# Altium PCB Tube03.PcbDoc (part 1 of 2)
Units mil, origin at the board's own origin, x right, y up, seen from the top; angles counter-clockwise.
Board outline 3701.35 x 3701.35 mil, 2 copper layers (Top Layer, Bottom Layer); 116 components, 79 nets, 440 pads, 68 vias.
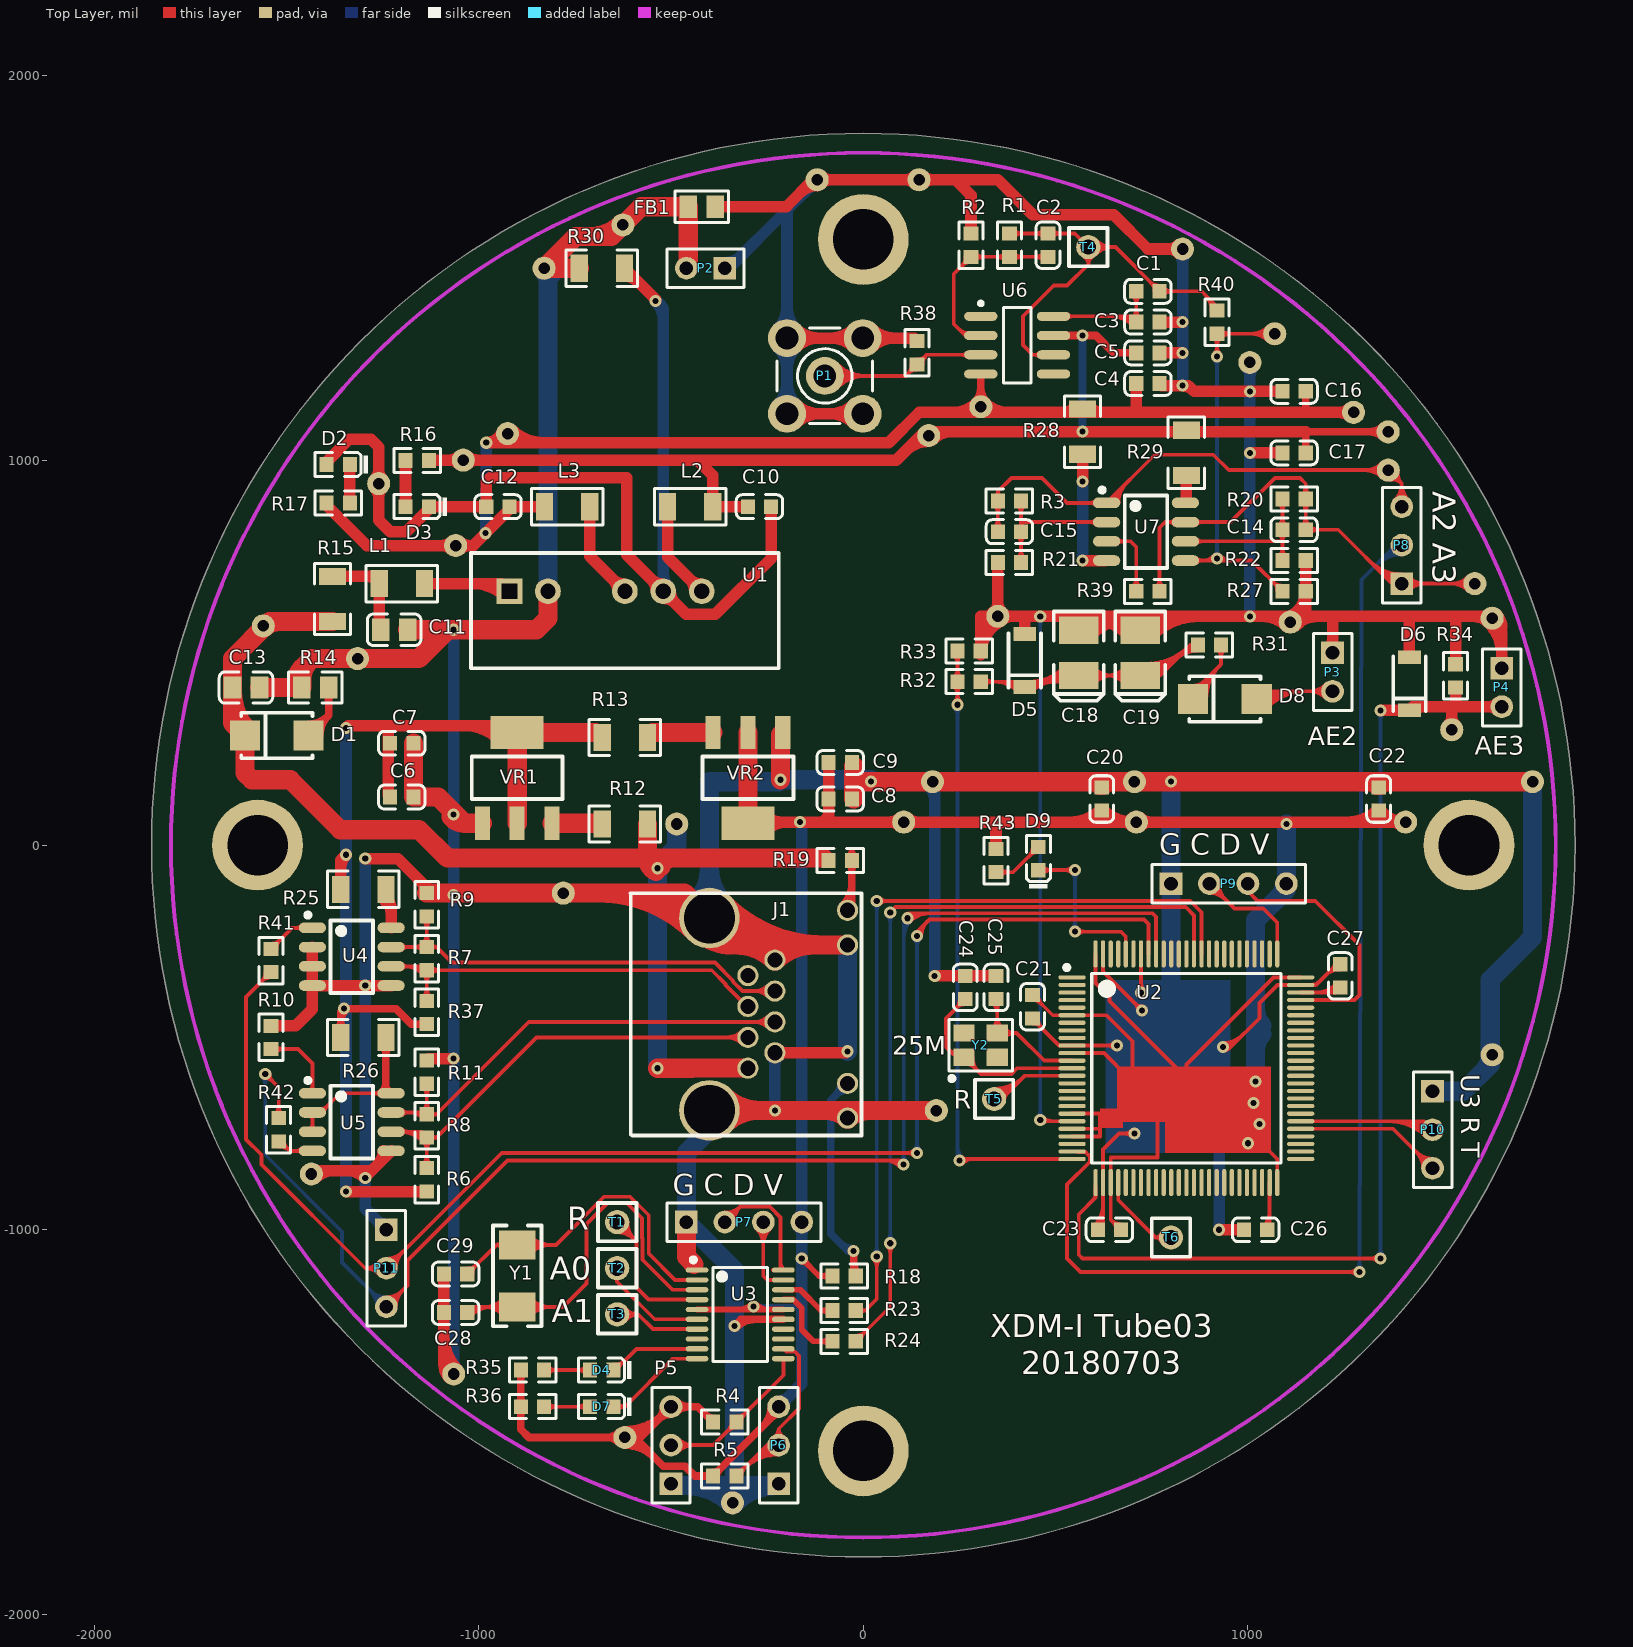
[diagram p0: Top Layer view]
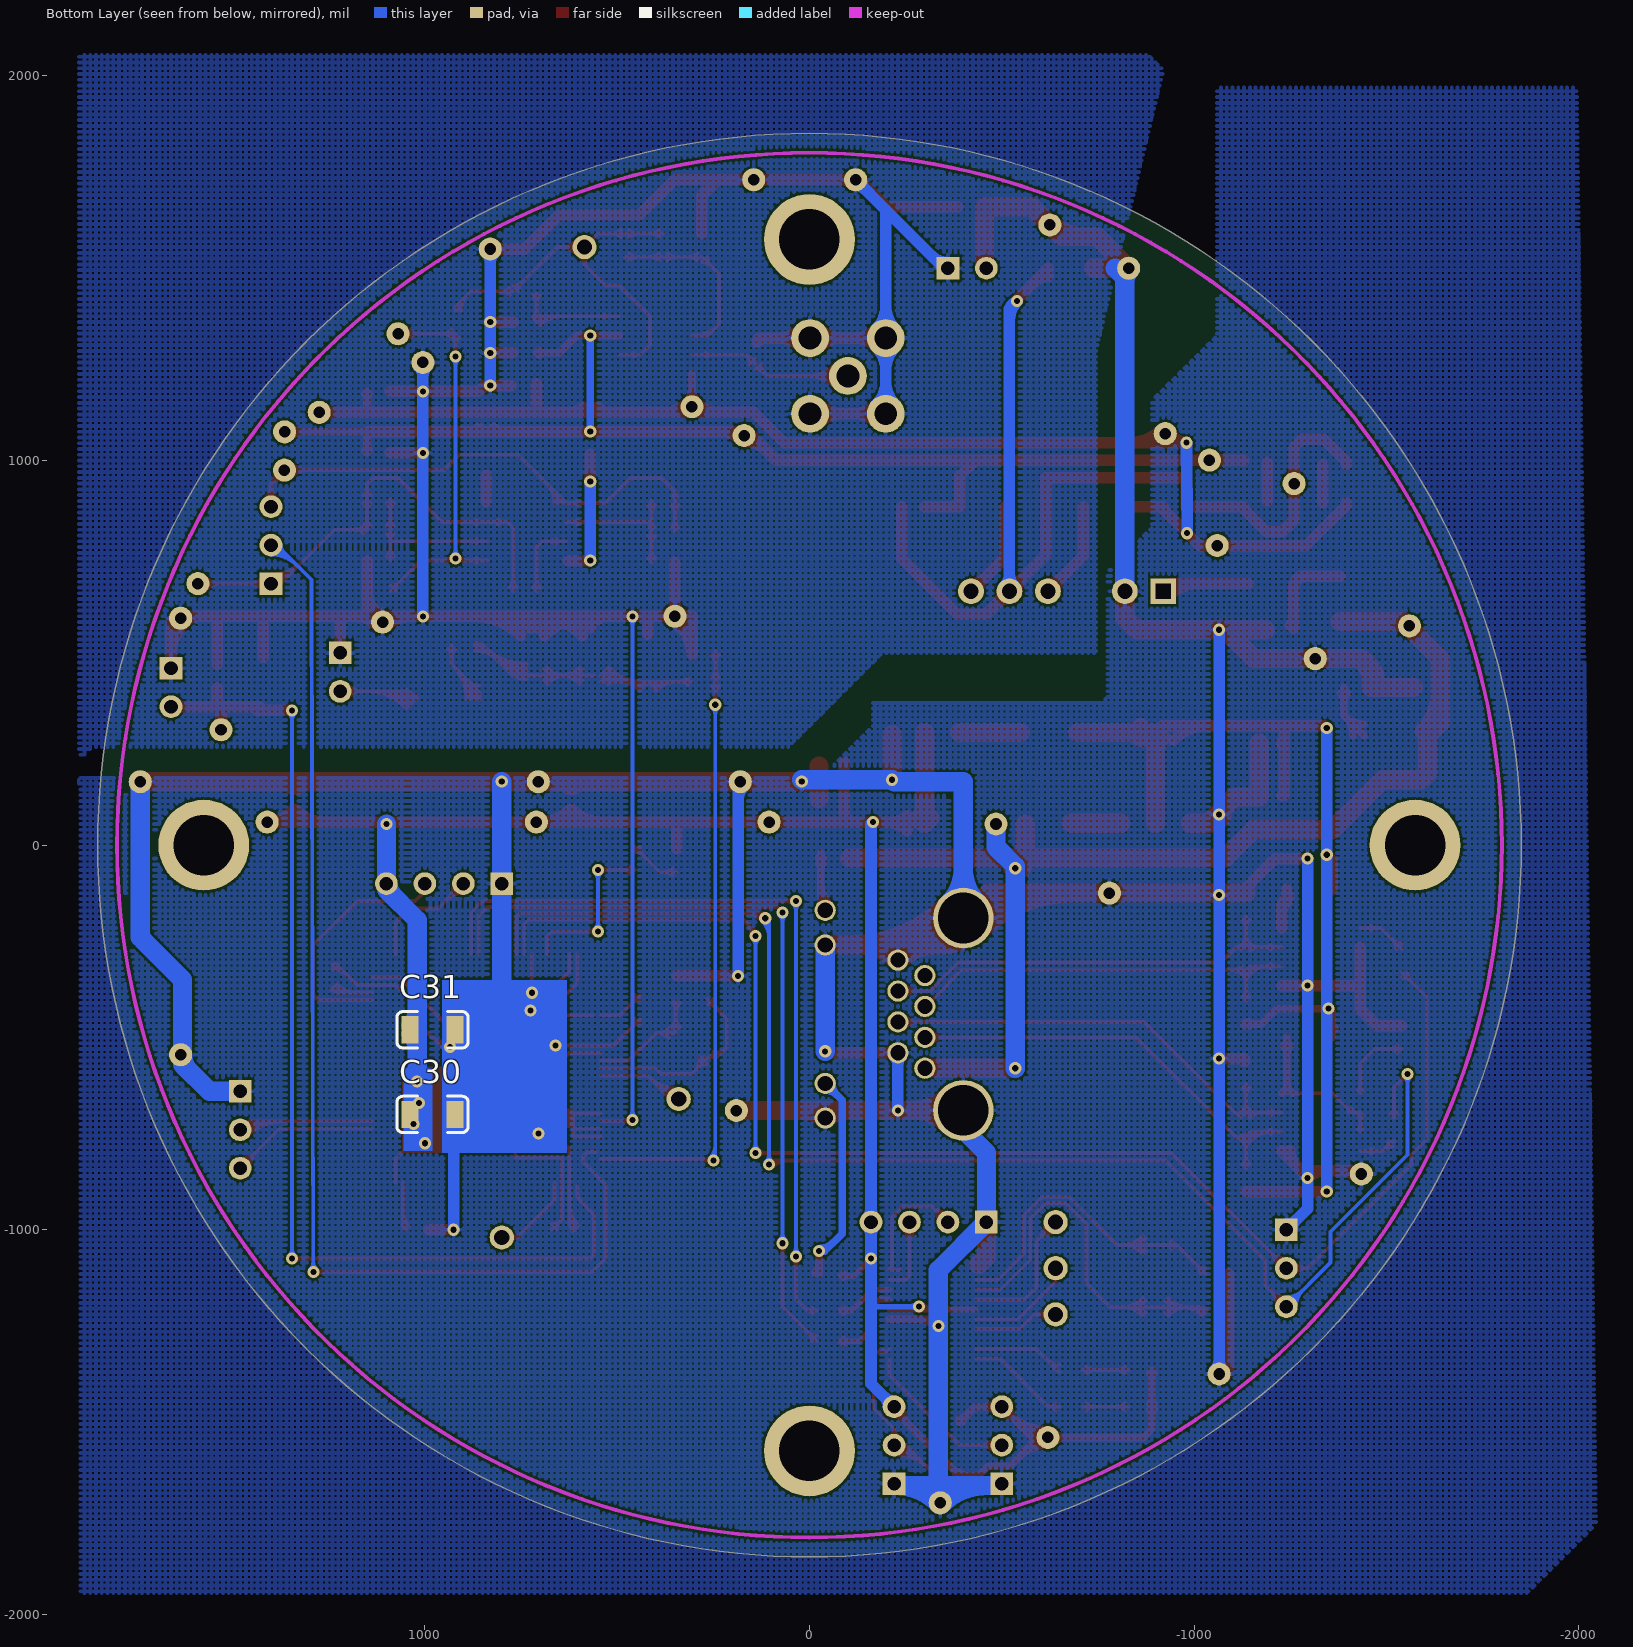
[diagram p1: Bottom Layer view, seen from below]
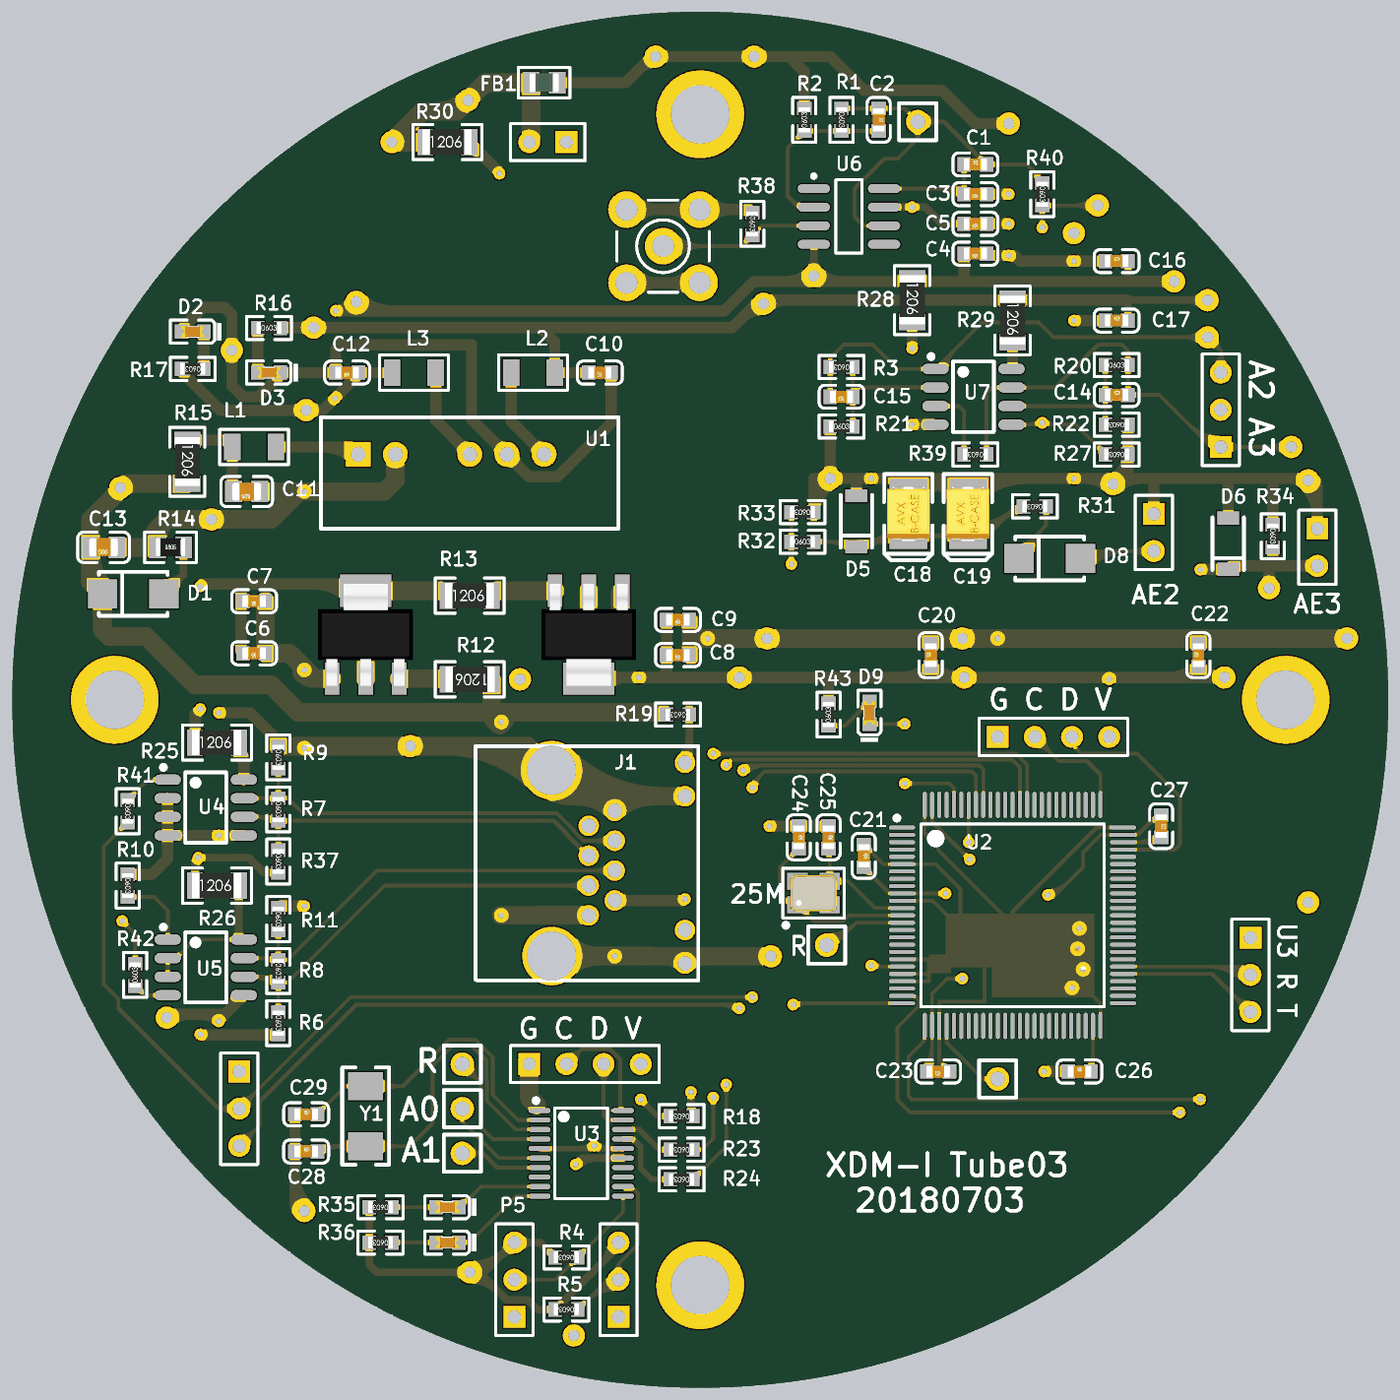
[diagram p3: 3D render of the assembled board from above, using the file's embedded part models]

## Layer stack, top to bottom
Top Layer: signal copper 1.4
Dielectric: dielectric 12.6, FR-4, Dk 4.8
Bottom Layer: signal copper 1.4

## Board outline
-1850.68,0 ccw(c0,0) 0,-1850.68 ccw(c0,0) 1850.68,0 ccw(c0,0) 0,1850.68 ccw(c0,0)

## Design rules (kind name [scope] priority, off if disabled: settings)
Clearance [All] p1: gap=6
DiffPairsRouting [All] p1: maxlimit=10 minlimit=10 mostfreqgap=10 maxuncoupledlength=500
Height [All] p1 off: minheight=0 maxheight=1000 prefheight=500
HoleSize [All] p1: absolutevalues=TRUE maxlimit=196.85 minlimit=11.81 maxpercent=80.000 minpercent=20.000
MinimumSolderMaskSliver [All] p1: minsoldermaskwidth=4
PolygonConnect [All] p1: connectstyle=Relief reliefconductorwidth=10 reliefentries=4 polygonreliefangle="90 Angle"
RoutingVias [All] p1: holewidth=15.75 width=31.5 viastyle="Through Hole" minholewidth=15.75 minwidth=31.5 maxholewidth=15.75 maxwidth=31.5
SilkscreenOverComponentPads [All] p1: minsilkscreentomaskgap=6
SolderMaskExpansion [All] p1: expansion=4
Width Width_V12 [InNet('V12')] p1: maxlimit=50 minlimit=10 preferedwidth=20
Width Width_V3.3 [InNet('V3.3')] p2: maxlimit=50 minlimit=10 preferedwidth=25
Width Width_V5 [InNet('V5')] p3: maxlimit=50 minlimit=10 preferedwidth=20
Width Width_GND [InNet('GND')] p4: maxlimit=50 minlimit=10 preferedwidth=25
Width [All] p5: maxlimit=50 minlimit=8 preferedwidth=10
23 further rules are at their usual default settings.

## Classes and differential pairs
component class mcu1: D9 P9 P10 R23 R24 R43 T6 U2
component class mcu2: C20 C21 C22 C23 C24 C25 C26 C27 C28 C29 C30 C31 D4 D7 P5 P6 P7 R4 R5 R35 R36 T1 T2 T3 T5 U3 Y1 Y2
component class Aex: C18 C19 D4 D5 D6 P3 P4 R31 R32 R33 R34
component class Power: C6 C7 C8 C9 C10 C11 C12 C13 D1 D2 D3 FB1 L1 L2 L3 P2 R12 R13 R14 R15 R16 R17 R30 U1 VR1 VR2
component class commu: J1 P11 R6 R7 R8 R9 R10 R11 R18 R19 R25 R26 R37 R41 R42 U4 U5
component class Amp: C1 C2 C3 C4 C5 C14 C15 C16 C17 P1 P8 R1 R2 R3 R20 R21 R22 R27 R28 R29 R38 R39 R40 T4 U6 U7
differential pair CON2: +CON2_P -CON2_N
differential pair CON1: +CON1_P -CON1_N

## Components (designator, comment, footprint, x,y, rotation, side; value= is the part's Value field where it differs from the comment)
C1 "47pF (470) 5% 50V" 0603_C 740,1440 r0 top
C2 "10pF (100) 5% 50V" 0603_C 480,1560 r270 top
C3 "10pF (100) 5% 50V" 0603_C 740,1360 r180 top
C4 "100nF (104) 10% 50V" 0603_C 740,1200 r180 top
C5 "100nF (104) 10% 50V" 0603_C 740,1280 r180 top
C6 "10uF (106) 10% 10V" 0603_C -1200,125 r180 top
C7 "100nF (104) 10% 50V" 0603_C -1200,265 r180 top
C8 "10uF (106) 10% 10V" 0603_C -60,120 r180 top
C9 "100nF (104) 10% 50V" 0603_C -60,215 r180 top
C10 "4.7uF (475) 10% 16V" 0603_C -270,880 r180 top
C11 "2.2uF (225) 20% 50V" 0805_C -1220,560 r180 top
C12 "4.7uF (475) 10% 16V" 0603_C -950,880 r180 top
C13 "22uF (226) 20% 25V" 0805_C -1605,410 r180 top
C14 "100nF (104) 10% 50V" 0603_C 1120,820 r0 top
C15 "100nF (104) 10% 50V" 0603_C 380,815 r180 top
C16 "100nF (104) 10% 50V" 0603_C 1120,1180 r0 top
C17 "100nF (104) 10% 50V" 0603_C 1120,1020 r0 top
C18 "100uF (107) ±10% 6.3V" CASE-B_3528 560,500 r270 top
C19 "100uF (107) ±10% 6.3V" CASE-B_3528 720,500 r270 top
C20 "100nF (104) 10% 50V" 0603_C 620,120 r90 top
C21 "100nF (104) 10% 50V" 0603_C 440,-420 r270 top
C22 "100nF (104) 10% 50V" 0603_C 1340,120 r90 top
C23 "100nF (104) 10% 50V" 0603_C 640,-1000 r180 top
C24 "12pF (120) 5% 50V" 0603_C 265,-370 r270 top
C25 "12pF (120) 5% 50V" 0603_C 345,-370 r270 top
C26 "100nF (104) 10% 50V" 0603_C 1020,-1000 r0 top
C27 "100nF (104) 10% 50V" 0603_C 1240,-340 r270 top
C28 "20pF (200) 5% 50V" 0603_C -1060,-1215 r0 top
C29 "20pF (200) 5% 50V" 0603_C -1060,-1115 r0 top
C30 "100nF (104) 10% 50V" 1206_C 980,-700 r180 bottom
C31 "10uF (106) 10% 50V" 1206_C 980,-480 r180 bottom
D1 "SS54" SMA(DO-214AC)_S1 -1525,285 r0 top
D2 "绿灯 0603" 0603_LED_S1 -1365,990 r180 top
D3 "绿灯 0603" 0603_LED_S1 -1160,880 r180 top
D4 "红灯 0603" 0603_LED_S1 -680,-1365 r180 top
D5 "ZMM5V6" LL-34 420,480 r90 top
D6 "ZMM3V3" LL-34 1420,420 r90 top
D7 "蓝灯 0603" 0603_LED_S1 -680,-1460 r180 top
D8 "US1M" SMA(DO-214AC)_S1 940,380 r0 top
D9 "蓝灯 0603" 0603_LED_S1 455,-35 r90 top
FB1 "100Ω ±25% 100MHz" 0805_L -420,1660 r0 top
J1 "RJ45" RJ45_1 -300,-580 r270 top
L1 "4.7uH  ±10%" 1206_L -1200,680 r0 top
L2 "4.7uH  ±10%" 1206_L -450,880 r0 top
L3 "4.7uH  ±10%" 1206_L -770,880 r180 top
P1 "SMB" SMB_V-RJ45 -100,1220 r0 top
P2 "Header 2" HDR1X2 -360,1500 r180 top
P3 "Header 2" HDR1X2 1220,500 r270 top
P4 "Header 2" HDR1X2 1660,460 r270 top
P5 "Header 3" HDR1X3 -500,-1660 r90 top
P6 "Header 3" HDR1X3 -220,-1660 r90 top
P7 "Header 4" HDR1X4 -460,-980 r0 top
P8 "Header 3" HDR1X3 1400,680 r90 top
P9 "Header 4" HDR1X4 800,-100 r0 top
P10 "Header 3" HDR1X3 1480,-640 r270 top
P11 "Header 3" HDR1X3 -1240,-1000 r270 top
R1 "1KΩ (1001) ±1%" 0603_R 380,1560 r270 top
R2 "10Ω (10R0) ±1%" 0603_R 280,1560 r90 top
R3 "1KΩ (1001) ±1%" 0603_R 380,895 r180 top
R4 "10KΩ (1002) ±1%" 0603_R -360,-1500 r180 top
R5 "10KΩ (1002) ±1%" 0603_R -360,-1640 r180 top
R6 "10KΩ (1002) ±1%" 0603_R -1135,-870 r270 top
R7 "120Ω (1200) ±1%" 0603_R -1135,-295 r270 top
R8 "120Ω (1200) ±1%" 0603_R -1135,-730 r270 top
R9 "10KΩ (1002) ±1%" 0603_R -1135,-155 r270 top
R10 "10KΩ (1002) ±1%" 0603_R -1540,-500 r270 top
R11 "10KΩ (1002) ±1%" 0603_R -1135,-590 r270 top
R12 "0.1Ω (R100) ±1%" 1206_R -620,55 r180 top
R13 "0.1Ω (R100) ±1%" 1206_R -620,280 r0 top
R14 "10KΩ (1002) ±1%" 0805_R -1425,410 r0 top
R15 "0.1Ω (R100) ±1%" 1206_R -1380,640 r270 top
R16 "10KΩ (1002) ±1%" 0603_R -1160,1000 r0 top
R17 "10KΩ (1002) ±1%" 0603_R -1365,890 r180 top
R18 "10KΩ (1002) ±1%" 0603_R -50,-1120 r180 top
R19 "47KΩ (4702) ±1%" 0603_R -60,-40 r180 top
R20 "2KΩ (2001) ±1%" 0603_R 1120,900 r0 top
R21 "200Ω (2000) ±1%" 0603_R 380,735 r0 top
R22 "100Ω (1000) ±1%" 0603_R 1120,740 r180 top
R23 "0Ω (0R0) ±1%" 0603_R -50,-1210 r180 top
R24 "0Ω (0R0) ±1%" 0603_R -50,-1290 r180 top
R25 "0Ω (0R0) ±1%" 1206_R -1300,-115 r0 top
R26 "0Ω (0R0) ±1%" 1206_R -1300,-500 r0 top
R27 "10KΩ (1002) ±1%" 0603_R 1120,660 r180 top
R28 "0.1Ω (R100) ±1%" 1206_R 570,1075 r270 top
R29 "0.1Ω (R100) ±1%" 1206_R 840,1020 r270 top
R30 "0Ω (0R0) ±1%" 1206_R -680,1500 r0 top
R31 "1Ω (1R00) ±1%" 0603_R 900,520 r180 top
R32 "10KΩ (1002) ±1%" 0603_R 275,425 r0 top
R33 "20KΩ (2002) ±1%" 0603_R 275,505 r180 top
R34 "75KΩ (7502) ±1%" 0603_R 1540,440 r270 top
R35 "10KΩ (1002) ±1%" 0603_R -860,-1365 r180 top
R36 "10KΩ (1002) ±1%" 0603_R -860,-1460 r180 top
R37 "10KΩ (1002) ±1%" 0603_R -1135,-435 r270 top
R38 "1KΩ (1001) ±1%" 0603_R 140,1280 r270 top
R39 "0Ω (0R0) ±1%" 0603_R 740,660 r180 top
R40 "0Ω (0R0) ±1%" 0603_R 920,1360 r270 top
R41 "0Ω (0R0) ±1%" 0603_R -1540,-300 r270 top
R42 "0Ω (0R0) ±1%" 0603_R -1520,-740 r90 top
R43 "10KΩ (1002) ±1%" 0603_R 345,-40 r90 top
T1 "TP1" TP1 -640,-980 r0 top
T2 "TP1" TP1 -640,-1100 r0 top
T3 "TP1" TP1 -640,-1220 r0 top
T4 "TP1" TP1 585,1555 r0 top
T5 "TP1" TP1 340,-660 r0 top
T6 "TP1" TP1 800,-1020 r0 top
U1 "A1205S" A1205S -1020,760 r0 top
U2 "STM32F407VET6" LQFP-100_14x14x05P 840,-580 r270 top
U3 "STM32F030F4P6" TSSOP-20 -320,-1220 r270 top
U4 "SN75176BDR" SOIC-8_150mil -1330,-290 r270 top
U5 "SN75176BDR" SOIC-8_150mil -1330,-720 r270 top
U6 "AD797AR" SO-8C_N 400,1300 r0 top
U7 "NE5532DR" SOIC-8_150mil 735,815 r270 top
VR1 "AMS1117-5.0" SOT-223 -900,175 r270 top
VR2 "AMS1117-3.3" SOT-223 -300,175 r90 top
Y1 "8MHz ±20ppm 20pF" SMD-5032_2P -900,-1120 r270 top
Y2 "25MHZ 12PF 10PPM" SMD-3225_4P 305,-520 r0 top

## Footprints (in the part's own frame and the unit in brackets; to place one, negate y for a bottom-side part, rotate by r counter-clockwise, add the part's x,y. Pads: shape width x height; smd on the part's side, far side on the other; paste and mask are expansions set on the pad)
0603_C [mm]
  rect 0.93x0.98 smd: 1(-0.77,0) 2(0.77,0)
  silkscreen extent -1.53,-0.79 1.54,0.79, body extent -0.8,-0.4 0.8,0.4, height 0.3
0603_LED_S1 [mm]
  rect 0.93x0.98 smd: A(0.77,0) K(-0.77,0)
  silkscreen extent -1.98,-0.79 1.54,0.79, body extent -0.8,-0.4 0.8,0.4, height 0.6
0603_R [mm]
  rect 0.93x0.98 smd: 1(-0.77,0) 2(0.77,0)
  silkscreen extent -1.54,-0.79 1.54,0.79, body extent -0.85,-0.4 0.85,0.4, height 0.56
0805_C [mm]
  rect 1.16x1.47 smd: 1(-0.89,0) 2(0.89,0)
  silkscreen extent -1.77,-1.04 1.77,1.04, body extent -1,-0.63 1,0.63, height 0.77
0805_L [mm]
  rect 1.16x1.47 smd: 1(-0.89,0) 2(0.89,0)
  silkscreen extent -1.77,-1.03 1.77,1.03, body extent -1,-0.64 1,0.64, height 0.6
0805_R [mm]
  rect 1.16x1.47 smd: 1(-0.89,0) 2(0.89,0)
  silkscreen extent -1.77,-1.03 1.77,1.03, body extent -1,-0.62 1,0.63, height 0.49
1206_C [mm]
  rect 1.13x1.8 smd: 1(-1.49,0) 2(1.49,0)
  silkscreen extent -2.36,-1.2 2.35,1.2, body extent -1.6,-0.81 1.6,0.79, height 1
1206_L [mm]
  rect 1.13x1.8 smd: 1(-1.49,0) 2(1.49,0)
  silkscreen extent -2.35,-1.2 2.35,1.2
1206_R [mm]
  rect 1.13x1.8 smd: 1(-1.49,0) 2(1.49,0)
  silkscreen extent -2.35,-1.2 2.35,1.2, body extent -1.7,-0.86 1.65,0.87, height 0.85
A1205S [mm]
  rect 1.7x1.7 hole 1 square: 1(2.54,-2.54)
  round 1.7 hole 1: 2(5.08,-2.54) 4(10.16,-2.54) 5(12.7,-2.54) 6(15.24,-2.54)
  silkscreen extent 0,-7.62 20.32,0
CASE-B_3528 [mm]
  rect 1.8x2.6 smd: 1(1.5,0) 2(-1.5,0)
  silkscreen extent -2.73,-1.65 3.16,1.65, body extent -1.85,-1.47 1.85,1.46, height 2.03
HDR1X2 [mm] "Connector; Header; 2 Position"
  rect 1.5x1.5 hole 0.9: 1(0,0)
  round 1.5 hole 0.9: 2(2.54,0)
  silkscreen extent -1.27,-1.27 3.81,1.27
HDR1X3 [mm] "Connector; Header; 3 Position"
  rect 1.5x1.5 hole 0.9: 1(0,0)
  round 1.5 hole 0.9: 2(2.54,0) 3(5.08,0)
  silkscreen extent -1.27,-1.27 6.35,1.27
HDR1X4 [mm] "Connector; Header; 4 Position"
  rect 1.5x1.5 hole 0.9: 1(0,0)
  round 1.5 hole 0.9: 2(2.54,0) 3(5.08,0) 4(7.62,0)
  silkscreen extent -1.27,-1.27 8.89,1.27
LL-34 [mm]
  rect 0.9x1.5 smd: 1(1.75,0) 2(-1.75,0)
  silkscreen extent -1.8,-1.07 1.8,1.07
LQFP-100_14x14x05P [mm]
  oval 0.28x1.8 smd mask+0.051: 1(-6,-7.55) 2(-5.5,-7.55) 3(-5,-7.55) 4(-4.5,-7.55) 5(-4,-7.55) 6(-3.5,-7.55) 7(-3,-7.55) 8(-2.5,-7.55) 9(-2,-7.55) 10(-1.5,-7.55) 11(-1,-7.55) 12(-0.5,-7.55) 13(0,-7.55) 14(0.5,-7.55) 15(1,-7.55) 16(1.5,-7.55) 17(2,-7.55) 18(2.5,-7.55) 19(3,-7.55) 20(3.5,-7.55) 21(4,-7.55) 22(4.5,-7.55) 23(5,-7.55) 24(5.5,-7.55) 25(6,-7.55) 51(6,7.55) 52(5.5,7.55) 53(5,7.55) 54(4.5,7.55) 55(4,7.55) 56(3.5,7.55) 57(3,7.55) 58(2.5,7.55) 59(2,7.55) 60(1.5,7.55) 61(1,7.55) 62(0.5,7.55) 63(0,7.55) 64(-0.5,7.55) 65(-1,7.55) 66(-1.5,7.55) 67(-2,7.55) 68(-2.5,7.55) 69(-3,7.55) 70(-3.5,7.55) 71(-4,7.55) 72(-4.5,7.55) 73(-5,7.55) 74(-5.5,7.55) 75(-6,7.55)
  oval 1.8x0.28 smd mask+0.051: 26(7.55,-6) 27(7.55,-5.5) 28(7.55,-5) 29(7.55,-4.5) 30(7.55,-4) 31(7.55,-3.5) 32(7.55,-3) 33(7.55,-2.5) 34(7.55,-2) 35(7.55,-1.5) 36(7.55,-1) 37(7.55,-0.5) 38(7.55,0) 39(7.55,0.5) 40(7.55,1) 41(7.55,1.5) 42(7.55,2) 43(7.55,2.5) 44(7.55,3) 45(7.55,3.5) 46(7.55,4) 47(7.55,4.5) 48(7.55,5) 49(7.55,5.5) 50(7.55,6) 76(-7.55,6) 77(-7.55,5.5) 78(-7.55,5) 79(-7.55,4.5) 80(-7.55,4) 81(-7.55,3.5) 82(-7.55,3) 83(-7.55,2.5) 84(-7.55,2) 85(-7.55,1.5) 86(-7.55,1) 87(-7.55,0.5) 88(-7.55,0) 89(-7.55,-0.5) 90(-7.55,-1) 91(-7.55,-1.5) 92(-7.55,-2) 93(-7.55,-2.5) 94(-7.55,-3) 95(-7.55,-3.5) 96(-7.55,-4) 97(-7.55,-4.5) 98(-7.55,-5) 99(-7.55,-5.5) 100(-7.55,-6)
  silkscreen extent -6.8,-8.05 6.25,6.25
RJ45_1 [mm]
  round 1.4 hole 1: 1(0,0) 2(-1.02,1.78) 3(-2.04,0) 4(-3.06,1.78) 5(-4.08,0) 6(-5.1,1.78) 7(-6.12,0) 8(-7.14,1.78) 9(3.29,6.58) 10(1,6.58) 11(-8.14,6.58) 12(-10.43,6.58)
  round 4 hole 3.35: 13(2.78,-2.54) 14(-9.92,-2.54)
  silkscreen extent -11.56,-7.75 4.45,7.49
SMA(DO-214AC)_S1 [mm]
  rect 2x2 smd: 1(2.1,0) 2(-2.1,0)
  silkscreen extent -2.35,-1.5 2.35,1.5
SMB_V-RJ45 [mm] "Connector; SMB Straight"
  round 2.5 hole 1.5: 1(0,0) 2(-2.5,-2.5) 2(-2.5,2.5) 2(2.5,-2.5) 2(2.5,2.5)
  silkscreen extent -3.15,-3.15 3.15,3.15
SMD-3225_4P [mm]
  rect 1.4x1.15 smd: 1(-1.1,-0.8) 2(1.1,-0.8) 3(1.1,0.8) 4(-1.1,0.8)
  silkscreen extent -2.1,-2.35 2.1,1.7, body extent -1.6,-1.25 1.6,1.25, height 0.61
SMD-5032_2P [mm]
  rect 1.9x2.4 smd: 1(-2.05,0) 2(2.05,0)
  silkscreen extent -3.33,-1.6 3.33,1.6
SO-8C_N [mm] "SOIC, 8-Leads, Body 4.9x3.9mm, Pitch 1.27mm, IPC Medium Density"
  oval 2.2x0.6 smd: 1(-2.4,1.905) 2(-2.4,0.635) 3(-2.4,-0.635) 4(-2.4,-1.905) 5(2.4,-1.905) 6(2.4,-0.635) 7(2.4,0.635) 8(2.4,1.905)
  silkscreen extent -2.52,-2.5 0.9,2.88, body extent -1.95,-2.45 1.95,2.45, height 1.75
SOIC-8_150mil [mm]
  oval 0.7x1.8 smd: 1(-1.905,-2.6) 2(-0.635,-2.6) 3(0.635,-2.6) 4(1.905,-2.6) 5(1.905,2.6) 6(0.635,2.6) 7(-0.635,2.6) 8(-1.905,2.6)
  silkscreen extent -2.9,-3.05 2.4,1.4
SOT-223 [mm]
  rect 2.2x1 smd: 1(3,-2.3) 2(3,0) 3(3,2.3)
  rect 2.2x3.5 smd: 2(-3,0)
  silkscreen extent -1.4,-3 1.4,3, body extent -3.49,-3.24 3.49,3.24, height 1.64
TP1 [mm] "Test Point 1"
  round 1.6 hole 1: 1(0,0)
  silkscreen extent -1.27,-1.27 1.27,1.27
TSSOP-20 [mm]
  oval 0.35x1.5 smd: 1(-2.925,-2.85) 2(-2.275,-2.85) 3(-1.625,-2.85) 4(-0.975,-2.85) 5(-0.325,-2.85) 6(0.325,-2.85) 7(0.975,-2.85) 8(1.625,-2.85) 9(2.275,-2.85) 10(2.925,-2.85) 11(2.925,2.85) 12(2.275,2.85) 13(1.625,2.85) 14(0.975,2.85) 15(0.325,2.85) 16(-0.325,2.85) 17(-0.975,2.85) 18(-1.625,2.85) 19(-2.275,2.85) 20(-2.925,2.85)
  silkscreen extent -3.75,-3.25 3.1,1.8

## Part data
C1: library part "0603 47pF (470) 5% 50V", "贴片电容"
C2 C3: library part "0603 10pF (100) 5% 50V", "贴片电容"
C4 C5 C7 C9 C14 C15 C16 C17 C20 C21 C22 C23 C26 C27: library part "0603 100nF (104) 10% 50V", "贴片电容"
C6 C8: library part "0603 10uF (106) 10% 10V", "贴片电容"
C10 C12: library part "0603 4.7uF (475) 10% 16V", "贴片电容"
C11: library part "0805 2.2uF (225) 20% 50V", "贴片电容"
C13: library part "0805 22uF (226) 20% 25V", "贴片电容"
C18 C19: library part "3528 100uF (107) 10% 6.3V", "钽电容"
C24 C25: library part "0603 12pF (120) 5% 50V", "贴片电容"
C28 C29: library part "0603 20pF (200) 5% 50V", "贴片电容"
C30: library part "1206 100nF (104) 10% 50V", "贴片电容"
C31: library part "1206 10uF (106) 10% 50V", "贴片电容"
D1: library part "SMA(DO-214AC) SS54", "二极管"
D2 D3: library part "0603 绿灯", "发光二极管"
D4: library part "0603 红灯", "发光二极管"
D5: library part "LL-34 ZMM5V6", "稳压二极管"
D6: library part "LL-34 ZMM3V3", "稳压二极管"
D7 D9: library part "0603 蓝灯", "发光二极管"
D8: library part "SMA(DO-214AC) US1M", "二极管"
FB1: library part "0805 100Ω 25% 100MHz", "贴片磁珠"
J1: library part RJ45_1
L1 L2 L3: library part "1206 4.7uH  10%", "贴片电感"
P1: "SMB Straight Connector"
P2 P3 P4: "Header, 2-Pin"
P5 P6 P8 P10 P11: "Header, 3-Pin"
P7 P9: "Header, 4-Pin"
R1 R3 R38: library part "0603 1KΩ (1001) 1%", "贴片电阻"
R2: library part "0603 10Ω (10R0) 1%", "贴片电阻"
R4 R5 R6 R9 R10 R11 R16 R17 R18 R27 R32 R35 R36 R37 R43: library part "0603 10KΩ (1002) 1%", "贴片电阻"
R7 R8: library part "0603 120Ω (1200) 1%", "贴片电阻"
R12 R13 R15 R28 R29: library part "1206 0.1Ω (R100) 1%", "贴片电阻"
R14: library part "0805 10KΩ (1002) 1%", "贴片电阻"
R19: library part "0603 47KΩ (4702) 1%", "贴片电阻"
R20: library part "0603 2KΩ (2001) 1%", "贴片电阻"
R21: library part "0603 200Ω (2000) 1%", "贴片电阻"
R22: library part "0603 100Ω (1000) 1%", "贴片电阻"
R23 R24 R39 R40 R41 R42: library part "0603 0Ω (0R0) 1%", "贴片电阻"
R25 R26 R30: library part "1206 0Ω (0R0) 1%", "贴片电阻"
R31: library part "0603 1Ω (1R00) 1%", "贴片电阻"
R33: library part "0603 20KΩ (2002) 1%", "贴片电阻"
R34: library part "0603 75KΩ (7502) 1%", "贴片电阻"
U2 U3: "ARM"
U4 U5: library part SN75176BDR_[C7063], "RS-485/RS-422"
U6: "Ultra-Low Distortion, Ultra-Low Noise Operational Amplifier"
U7: library part NE5532DR_[C7426], "功放"
VR1: library part "SOT-223 AMS1117-5.0", "低压差线性稳压(LDO)"
VR2: library part "SOT-223 AMS1117-3.3", "低压差线性稳压(LDO)"
Y1: library part "SMD-5032_2P 8MHz 20ppm 20pF", "贴片晶振"
Y2: library part "SMD-3225_4P  25MHZ 12PF 10PPM", "贴片晶振"

## Free pads (board coordinates)
  round 60 hole 30: 0(-1040,1001) 0(-830,1500) 0(-485,55) 0(-120,1730) 0(1635,-545) 1(-1065,-1375) 1(-1060,779) 1(105,60) 1(145,1730) 2(-1260,940) 2(710,60) 3(-1560,570) 3(705,165) 4(-1315,485) 4(180,165) 5(-1435,-855) 5(-780,-124.69) 6(-625.04,1612.52) 6(-620,-1540) 7(-340,-1710) 7(830,1550) 8(1069.68,1329.68) 8(1530,300) 9(1110,580) 9(1590,680) 10(-925,1070) 10(1365,975) 11(1274.68,1125.32) 12(1364.68,1074.68) 13(1005,1255) 16(305.51,1140) 17(170,1065) 18(1635,590) 19(349.69,595) 20(1740,165) 21(1410,60) 22(190,-690)
  round 236.22 hole 157.48: 0(1574.8,0) 1(0,1574.8) 2(0,-1574.8) 3(-1574.8,0)

## Via types
v1: diameter 31.5, hole 15.75, Top Layer to Bottom Layer, 68 vias

## Nets (pads, with @x,y where several pads share a name; then routed paths per layer and width w, separated by ;. In a path a pad name is that pad's centre, name@x,y a point inside that pad or via, vN(x,y) a via of type N, cw(c..) or ccw(c..) an arc to the next point about the centre after c; other vN are vias at no path point)
A0_030: T2.1 U3.6 | length 283.3
  Top Layer w10: T2.1@-640,-1100 -640,-1135 -542.2,-1232.8 U3.6@-432.2,-1232.8
A1_030: T3.1 U3.7 | length 351.4
  Top Layer w10: T3.1@-640,-1220 -585,-1220 ; T3.1@-627.1,-1230.28 cw(c-605.76,-1247.29) -605.76,-1220 cw(c-605.76,-1192.71) T3.1@-627.1,-1209.72 ; T3.1@-619.28,-1236.51 cw(c-585,-1263.83) -585,-1220 ; T3.1@-619.28,-1203.49 ccw(c-585,-1176.17) -585,-1220 ; U3.7@-432.2,-1258.39 -546.61,-1258.39 -585,-1220
A2_030: U3.8
AD1_IN+: P1.1 R38.2 U6.3 | length 944.3
  Top Layer w10: P1.1@-100,1220 110.32,1220 165.32,1275 U6.3@305.51,1275 ; P1.1@-82.88,1202.88 cw(c-41.55,1161.55) -41.55,1220 cw(c-41.55,1278.45) P1.1@-82.88,1237.12 ; P1.1@-75.81,1195.81 cw(c-17.4,1137.4) -17.4,1220 cw(c-17.4,1302.6) P1.1@-75.81,1244.19 ; P1.1@-68.74,1188.74 cw(c6.74,1113.26) 6.74,1220 cw(c6.74,1326.74) P1.1@-68.74,1251.26 ; 115.6,1225.29 ccw(c91.21,1249.68) R38.2@125.71,1249.68 ; 117.98,1227.66 cw(c139.02,1206.63) R38.2@139.02,1236.38 ; R38.2@140.98,1262.99 ccw(c140.98,1292.74) 162.02,1271.7 ; R38.2@154.29,1249.68 cw(c188.79,1249.68) 164.4,1274.08 ; U6.3@269.2,1270.18 ccw(c257.57,1258.56) 257.57,1275 ccw(c257.57,1291.44) U6.3@269.2,1279.82
AD1_IN-: C2.2 R1.2 R2.1 U6.2 | length 758.6
  Top Layer w10: 247,1343 ccw(c274.02,1370.02) U6.2@274.02,1331.81 ; 255.6,1505.29 ccw(c231.21,1529.69) R2.1@265.71,1529.69 ; 257.98,1507.67 cw(c279.02,1486.63) R2.1@279.02,1516.38 ; R2.1@290.39,1520.28 cw(c313.11,1497.56) 313.11,1529.69 cw(c313.11,1561.81) R2.1@290.39,1539.1 ; U6.2@305.51,1325 265,1325 235,1355 235,1484.69 R2.1@280,1529.69 C2.2@480,1529.69 ; R1.2@369.61,1520.27 ccw(c346.89,1497.56) 346.89,1529.68 ccw(c346.89,1561.81) R1.2@369.61,1539.09 ; R1.2@390.39,1520.27 cw(c413.11,1497.56) 413.11,1529.68 cw(c413.11,1561.81) R1.2@390.39,1539.09 ; C2.2@469.61,1520.28 ccw(c446.89,1497.56) 446.89,1529.69 ccw(c446.89,1561.81) C2.2@469.61,1539.1
AD1_OUT: C1.2 C2.1 R1.1 R40.1 T4.1 U6.6 | length 1630.6
  Top Layer w10: R1.1@380,1590.31 520,1590.31 549.68,1590.32 T4.1@585,1555 ; R1.1@390.39,1580.9 cw(c413.11,1558.19) 413.11,1590.31 cw(c413.11,1622.44) R1.1@390.39,1599.72 ; U6.6@458.18,1270.18 ccw(c446.55,1258.56) 446.55,1275 ccw(c446.55,1291.44) U6.6@458.18,1279.82 ; C2.1@469.61,1580.91 ccw(c446.89,1558.19) 446.89,1590.32 ccw(c446.89,1622.44) C2.1@469.61,1599.73 ; C2.1@490.39,1580.91 cw(c513.11,1558.19) 513.11,1590.31 cw(c513.11,1622.44) C2.1@490.39,1599.73 ; U6.6@494.49,1275 440,1275 415,1300 415,1375 495,1455 530,1455 585,1510 ; T4.1@572.15,1531.83 cw(c560.04,1510) 585,1510 ; T4.1@596.66,1543.34 cw(c624.82,1515.18) 624.82,1555 cw(c624.82,1594.82) T4.1@596.66,1566.66 ; T4.1@597.85,1531.83 ccw(c609.96,1510) 585,1510 ; T4.1@603.74,1536.26 cw(c648.97,1491.03) 648.97,1555 cw(c648.97,1618.97) T4.1@603.74,1573.74 ; 745.92,1464.4 ccw(c770.32,1488.79) C1.2@770.32,1454.29 ; 748.3,1462.02 cw(c727.26,1440.98) C1.2@757.01,1440.98 ; C1.2@779.73,1430.59 cw(c802.44,1407.87) 802.44,1440 cw(c802.44,1472.13) C1.2@779.73,1449.41 ; 888.75,1431.25 cw(c847.82,1390.31) R40.1@905.71,1390.31 ; 905.83,1414.17 cw(c881.96,1390.31) R40.1@915.71,1390.31 ; R40.1@920,1390.31 920,1400 880,1440 C1.2@770.32,1440 655.32,1555 T4.1@585,1555 ; 585,1510 T4.1@585,1555
AD2+: pad.8@1069.68,1329.68 R27.2 R40.2 U7.5 | length 1546.1
  Top Layer w10: U7.5@837.36,740 1009.68,740 R27.2@1089.68,660 ; U7.5@865.22,733.79 cw(c880.21,718.8) 880.21,740 cw(c880.21,761.2) U7.5@865.22,746.21 ; 881.98,740 ccw(c881.98,783.02) v1@912.4,752.6 ; R40.2@910.59,1320.27 cw(c887.87,1297.56) 920,1297.56 cw(c952.13,1297.56) R40.2@929.41,1320.27 ; v1@912.4,1277.6 ccw(c894.05,1295.95) 920,1295.95 ccw(c945.95,1295.95) v1@927.6,1277.6 ; v1(920,1270) R40.2@920,1329.68 pad.8@1069.68,1329.68 ; v1@927.6,752.6 ccw(c958.02,783.02) 958.02,740 ; R40.2@930.39,1320.27 cw(c953.11,1297.56) 953.11,1329.68 cw(c953.11,1361.81) R40.2@930.39,1339.09 ; pad.8@1052.01,1312.01 ccw(c1009.33,1269.33) 1009.33,1329.68 ccw(c1009.33,1390.04) pad.8@1052.01,1347.36 ; pad.8@1059.08,1319.08 ccw(c1033.47,1293.47) 1033.47,1329.68 ccw(c1033.47,1365.9) pad.8@1059.08,1340.29 ; 1065.29,684.4 ccw(c1089.68,708.79) R27.2@1089.68,674.29 ; 1067.66,682.02 cw(c1046.63,660.98) R27.2@1076.38,660.98
  Bottom Layer w10: v1@912.4,752.6 ccw(c894.05,770.95) 920,770.95 ccw(c945.95,770.95) v1@927.6,752.6 ; v1@912.4,1262.4 cw(c894.05,1244.05) 920,1244.05 cw(c945.95,1244.05) v1@927.6,1262.4 ; v1(920,745) v1(920,1270)
AD2-: C14.1 R20.1 R22.2 U7.6 | length 640
  Top Layer w10: U7.6@837.36,790 1089.68,790 ; U7.6@865.22,783.79 cw(c880.21,768.8) 880.21,790 cw(c880.21,811.2) U7.6@865.22,796.21 ; R22.2@1080.27,750.39 ccw(c1057.56,773.11) 1089.68,773.11 ccw(c1121.81,773.11) R22.2@1099.09,750.39 ; C14.1@1080.28,830.39 ccw(c1057.56,853.11) 1089.69,853.11 ccw(c1121.81,853.11) C14.1@1099.1,830.39 ; R20.1@1080.28,889.61 cw(c1057.56,866.89) 1089.68,866.89 cw(c1121.82,866.88) R20.1@1099.1,889.61 ; C14.1@1081,808.93 cw(c1064.71,790) 1089.68,790 ; R22.2@1089.68,740 1089.68,790 ; R20.1@1089.69,900 1089.68,790 ; C14.1@1098.37,808.93 ccw(c1114.66,790) 1089.68,790
AD2_OUT: C14.2 P8.1 pad.9@1590,680 R20.2 R39.1 U7.7 | length 2103.3
  Top Layer w10: R39.1@760.9,670.39 ccw(c738.19,693.11) 770.31,693.11 ccw(c802.44,693.11) R39.1@779.72,670.39 ; R39.1@770.31,660 770.31,825.31 785,840 U7.7@837.36,840 955,840 1070,955 1135,955 1150.32,939.68 R20.2@1150.32,900 C14.2@1150.32,820 1235,820 1375,680 P8.1@1400,680 pad.9@1590,680 ; U7.7@809.5,833.79 ccw(c794.51,818.8) 794.51,840 ccw(c794.51,861.2) U7.7@809.5,846.21 ; U7.7@865.22,833.79 cw(c880.21,818.8) 880.21,840 cw(c880.21,861.2) U7.7@865.22,846.21 ; C14.2@1140.91,830.39 ccw(c1118.19,853.11) 1150.32,853.11 ccw(c1182.44,853.11) C14.2@1159.73,830.39 ; R20.2@1140.91,889.61 cw(c1118.19,866.89) 1150.32,866.89 cw(c1182.44,866.89) R20.2@1159.73,889.61 ; R20.2@1140.91,910.39 ccw(c1118.19,933.11) 1150.32,933.11 ccw(c1182.44,933.11) R20.2@1159.73,910.39 ; C14.2@1159.73,810.59 cw(c1182.44,787.87) 1182.44,820 cw(c1182.44,852.13) C14.2@1159.73,829.41 ; 1315.45,739.55 ccw(c1400,824.1) P8.1@1400,704.53 ; 1332.52,722.48 ccw(c1400,789.96) P8.1@1400,694.53 ; 1349.59,705.41 ccw(c1400,755.81) P8.1@1400,684.53 ; 1366.66,688.34 ccw(c1400,721.67) P8.1@1400,674.53 ; P8.1@1410.27,669.73 cw(c1435.07,644.93) 1435.07,680 cw(c1435.07,715.07) P8.1@1410.27,690.27 ; P8.1@1417.34,662.66 cw(c1459.21,620.79) 1459.21,680 cw(c1459.21,739.21) P8.1@1417.34,697.34 ; pad.9@1572.32,662.32 ccw(c1529.64,619.64) 1529.64,680 ccw(c1529.64,740.36) pad.9@1572.32,697.68 ; pad.9@1579.39,669.39 ccw(c1553.79,643.79) 1553.79,680 ccw(c1553.79,716.21) pad.9@1579.39,690.61
AD3+: R39.2 U7.3 | length 282.2
  Top Layer w10: U7.3@632.64,790 695,790 709.68,775.32 R39.2@709.68,660 ; U7.3@660.5,783.79 cw(c675.49,768.8) 675.49,790 cw(c675.49,811.2) U7.3@660.5,796.21 ; R39.2@700.27,670.39 ccw(c677.56,693.11) 709.68,693.11 ccw(c741.81,693.11) R39.2@719.09,670.39
AD3-: C15.1 R3.1 R21.2 U7.2 | length 597.4
  Top Layer w10: R21.2@400.91,745.39 ccw(c378.19,768.11) 410.31,768.11 ccw(c442.45,768.12) R21.2@419.73,745.39 ; C15.1@400.9,804.61 cw(c378.19,781.89) 410.31,781.89 cw(c442.44,781.89) C15.1@419.72,804.61 ; R3.1@400.9,884.61 cw(c378.19,861.89) 410.31,861.89 cw(c442.44,861.89) R3.1@419.72,884.61 ; C15.1@403.26,827.27 ccw(c395.3,840) 410.31,840 ; R21.2@410.32,735 C15.1@410.31,815 410.31,840 ; R3.1@410.31,895 410.31,840 ; C15.1@417.37,827.27 cw(c425.33,840) 410.31,840 ; U7.2@604.78,833.79 ccw(c589.79,818.8) 589.79,840 ccw(c589.79,861.2) U7.2@604.78,846.21 ; U7.2@632.64,840 410.31,840
AD3_OUT: C15.2 P8.3 pad.10@1365,975 R3.2 U7.1 | length 1988.3
  Top Layer w10: C15.2@340.27,825.39 ccw(c317.56,848.11) 349.68,848.11 ccw(c381.81,848.11) C15.2@359.09,825.39 ; R3.2@340.27,884.61 cw(c317.56,861.89) 349.68,861.89 cw(c381.81,861.89) R3.2@359.09,884.61 ; R3.2@342.76,907.35 ccw(c335.23,919.68) 349.68,919.68 ; C15.2@349.68,815 R3.2@349.68,895 349.68,919.68 ; R3.2@356.61,907.35 cw(c364.13,919.68) 349.68,919.68 ; U7.1@604.78,883.79 ccw(c589.79,868.8) 589.79,890 ccw(c589.79,911.2) U7.1@604.78,896.21 ; U7.1@633.07,890 cw(c634.12,890) U7.1@633.38,890.74 ; U7.1@643.07,890 cw(c668.26,890) 650.45,907.81 ; U7.1@653.07,890 cw(c702.4,890) 667.52,924.88 ; U7.1@663.07,890 cw(c736.54,890) 684.59,941.95 ; pad.10@1347.32,957.32 ccw(c1304.64,914.64) 1304.64,975 ccw(c1304.64,1035.36) pad.10@1347.32,992.68 ; pad.10@1354.39,964.39 ccw(c1328.79,938.79) 1328.79,975 ccw(c1328.79,1011.21) pad.10@1354.39,985.61 ; pad.10@1368.74,950.28 cw(c1374.19,914.2) 1400,940 ; P8.3@1382.66,897.34 ccw(c1340.79,939.21) 1400,939.21 ccw(c1459.21,939.21) P8.3@1417.34,897.34 ; pad.10@1389.72,971.26 ccw(c1425.8,965.81) 1400,940 ; P8.3@1389.73,890.27 ccw(c1364.93,915.07) 1400,915.07 ccw(c1435.07,915.07) P8.3@1410.27,890.27 ; P8.3@1400,880 1400,940 ; 349.68,919.68 385,955 465,955 530,890 U7.1@632.64,890 757.64,1015 910,1015 950,975 pad.10@1365,975 1400,940
AE1: P8.2 U2.24 | length 3320.3
  Top Layer w10: U2.24@556.28,-797.37 577.18,-797.37 589.19,-809.38 589.19,-823.06 530,-882.25 530,-1075 565,-1110 v1(1290,-1110) ; U2.24@572.68,-797.05 cw(c572.68,-807.14) 579.81,-800 ; v1@1282.4,-1117.6 ccw(c1264.05,-1135.95) 1264.05,-1110 ccw(c1264.05,-1084.05) v1@1282.4,-1102.4
  Bottom Layer w10: v1@1282.42,-1102.38 ccw(c1264.12,-1083.98) 1290.07,-1084.05 ccw(c1316.02,-1084.12) v1@1297.62,-1102.42 ; v1(1290,-1110) 1295,690 1385,780 P8.2@1400,780 ; 1332.52,727.52 cw(c1400,660.04) P8.2@1400,755.47 ; 1349.59,744.59 cw(c1400,694.19) P8.2@1400,765.47 ; 1366.66,761.66 cw(c1400,728.33) P8.2@1400,775.47 ; 1368.74,763.74 ccw(c1352.47,780) P8.2@1375.47,780
AE2: R32.1 R33.2 U2.25 | length 1923.6
  Top Layer w10: R33.2@235.27,494.61 cw(c212.56,471.89) 244.68,471.89 cw(c276.81,471.89) R33.2@254.09,494.61 ; R32.1@235.28,414.61 cw(c211.8,391.13) 245,391.13 ; R32.1@235.28,435.39 ccw(c212.56,458.11) 244.68,458.11 ccw(c276.82,458.12) R32.1@254.1,435.39 ; v1@237.4,372.6 ccw(c219.05,390.95) 245,390.95 ccw(c270.95,390.95) v1@252.6,372.6 ; R33.2@244.68,505 R32.1@244.69,425 245,424.69 v1(245,365) ; 245,392.65 cw(c276.05,392.65) R32.1@254.1,414.61 ; v1@253.78,-816.22 U2.25@542.76,-816.22 ; v1@257.6,-827.6 cw(c285.07,-855.07) 285.07,-816.22 ; v1@257.6,-812.4 ccw(c266.82,-803.18) 266.82,-816.22
  Bottom Layer w10: v1@237.4,357.4 cw(c219.05,339.05) 245,339.05 cw(c270.95,339.05) v1@252.6,357.4 ; 245,-781.98 ccw(c288.02,-781.98) v1@257.6,-812.4 ; v1(245,365) 245,-815 v1(250,-820)
AE3: D6.2 P4.2 pad.8@1530,300 R34.2 U2.26 | length 3112.8
  Top Layer w10: 596.5,-923.5 ccw(c580.17,-907.17) U2.26@603.27,-907.17 ; U2.26@603.78,-886.22 603.78,-916.22 560,-960 560,-1065 570,-1075 v1(1345,-1075) ; v1@1337.4,-1082.6 ccw(c1319.05,-1100.95) 1319.05,-1075 ccw(c1319.05,-1049.05) v1@1337.4,-1067.4
  Top Layer w30: v1(1345,350) 1346.1,351.1 D6.2@1420,351.1 ; D6.2@1428.9,360 1540,360 ; D6.2@1433.73,349.18 cw(c1459.85,323.06) 1459.85,360 ; pad.8@1519.39,310.61 ccw(c1493.79,336.21) 1530,336.21 ccw(c1566.21,336.21) pad.8@1540.61,310.61 ; pad.8@1530,300 1530,350 1540,360 ; R34.2@1540,409.68 1540,360 ; P4.2@1649.73,349.73 ccw(c1624.93,324.93) 1624.93,360 ccw(c1624.93,395.07) P4.2@1649.73,370.27 ; P4.2@1660,360 1540,360
  Bottom Layer w10: v1@1337.4,-1067.4 ccw(c1319.05,-1049.05) 1345,-1049.05 ccw(c1370.95,-1049.05) v1@1352.6,-1067.4 ; v1@1337.4,342.4 cw(c1319.05,324.05) 1345,324.05 cw(c1370.95,324.05) v1@1352.6,342.4 ; v1(1345,-1075) v1(1345,350)
AE4: T6.1 U2.29 | length 262.7
  Top Layer w10: U2.29@662.83,-877.24 662.83,-922.83 760,-1020 ; T6.1@775.6,-1030.33 ccw(c760,-1036.94) 760,-1020 ; T6.1@775.6,-1009.67 cw(c760,-1003.06) 760,-1020 ; T6.1@800,-1020 760,-1020
AGND: C3.1 C4.1 C5.1 C16.1 C17.1 C18.2 C19.2 D5.1 D6.1 FB1.2 P1.2 P2.1 P3.1 P4.1 pad.0@-120,1730 pad.1@145,1730 pad.7@830,1550 pad.9@1110,580 pad.13 pad.18 pad.19 R2.2 R21.1 R22.1 R27.1 R33.1 R34.1 R38.1 U2.20 | length 11437.8
  Top Layer w10: v1(460,-715) 477.8,-717.8 U2.20@542.76,-717.8 ; v1@467.6,-722.6 cw(c479.2,-734.2) 479.2,-717.8 ; v1@467.6,-707.4 ccw(c492.7,-682.3) 492.7,-717.8
  Top Layer w30: FB1.2@-384.96,1660 -200,1660 ; P1.2@-198.43,1121.57 P1.2@-1.57,1121.57 ; P1.2@-198.43,1318.43 P1.2@-1.57,1318.43 R38.1@131.89,1318.43 ; -198.43,1661.57 -130,1730 pad.0@-120,1730 pad.1@145,1730 240,1730 ; P1.2@-174.23,1097.38 cw(c-115.83,1038.98) -115.83,1121.57 cw(c-115.83,1204.17) P1.2@-174.23,1145.77 ; P1.2@-174.23,1294.23 cw(c-115.83,1235.83) -115.83,1318.43 cw(c-115.83,1401.02) P1.2@-174.23,1342.62 ; -162.68,1697.32 cw(c-120,1654.64) pad.0@-120,1715 ; pad.0@-109.39,1719.39 cw(c-83.79,1693.79) -83.79,1730 cw(c-83.79,1766.21) pad.0@-109.39,1740.61 ; P1.2@-25.77,1097.38 ccw(c-84.17,1038.98) -84.17,1121.57 ccw(c-84.17,1204.17) P1.2@-25.77,1145.77 ; P1.2@-25.77,1294.23 ccw(c-84.17,1235.83) -84.17,1318.43 ccw(c-84.17,1401.02) P1.2@-25.77,1342.62 ; P1.2@22.62,1294.23 cw(c81.02,1235.83) 81.02,1318.43 cw(c81.02,1401.02) P1.2@22.62,1342.62 ; 111.45,1318.43 cw(c111.45,1282.75) R38.1@136.68,1307.98 ; pad.1@134.39,1719.39 ccw(c108.79,1693.79) 108.79,1730 ccw(c108.79,1766.21) pad.1@134.39,1740.61 ; pad.1@155.61,1719.39 cw(c181.21,1693.79) 181.21,1730 cw(c181.21,1766.21) pad.1@155.61,1740.61 ; R2.2@280,1590.32 280,1690 240,1730 ; R33.1@305,494.8 cw(c403.95,494.8) pad.19@356.83,581.81 ; 305,545.16 cw(c376.67,545.16) pad.19@342.54,608.19 ; R33.1@305.31,505 305,505.31 305,595 pad.19@349.69,595 ; pad.19@339.08,584.39 ccw(c313.47,558.79) 313.47,595 ccw(c313.47,631.21) 339.08,605.61 ccw(c313.47,631.21) 349.69,631.21 ccw(c385.9,631.21) 360.29,605.61 ccw(c385.9,631.21) 385.9,595 ccw(c385.9,558.79) pad.19@360.29,584.39 ; R21.1@349.69,735 pad.19@349.69,595 ; D5.1@420,548.9 420,590 ; v1@470,595 490,595 ; C18.2@547.77,587.03 cw(c567.01,567.8) 567.01,595 ; 568.14,595 cw(c568.14,422.94) C19.2@689.8,544.61 ; C18.2@568.98,565.82 cw(c639.43,495.37) 639.43,595 ; C18.2@590.2,544.61 cw(c711.86,422.94) 711.86,595 ; 640.57,595 cw(c640.57,495.37) C19.2@711.02,565.82 ; C19.2@707.77,587.03 cw(c727.01,567.8) 727.01,595 ; 712.99,595 cw(c712.99,567.8) C19.2@732.23,587.03 ; C19.2@728.98,565.82 cw(c799.43,495.37) 799.43,595 ; C19.2@750.2,544.61 cw(c871.86,422.94) 871.86,595 ; C5.1@770.32,1280 v1(830,1280) ; C3.1@770.31,1360 v1(830,1360) ; C4.1@775.31,1195 v1(830,1195) 845,1195 860,1180 v1(1005,1180) C16.1@1089.69,1180 ; pad.7@819.39,1539.39 ccw(c793.79,1513.79) 793.79,1550 ccw(c793.79,1586.21) pad.7@819.39,1560.61 ; v1@830,1194.25 cw(c830,1156.23) 856.88,1183.12 ; pad.7@830,1550 740,1550 650.92,1639.08 440.92,1639.08 350,1730 240,1730 ; v1(1005,1020) C17.1@1089.69,1020 ; 1037.57,595 cw(c1037.57,507.57) pad.9@1099.39,569.39 ; pad.9@1104.7,594.03 ccw(c1079.81,660) R27.1@1150.31,660 ; pad.9@1115.3,565.97 ccw(c1096.18,616.61) 1150.31,616.61 ; pad.9@1120.61,569.39 cw(c1182.43,507.57) 1182.43,595 ; 1150.31,595.31 R27.1@1150.31,660 ; R22.1@1150.31,740 R27.1@1150.31,660 ; P3.1@1209.73,510.27 ccw(c1184.93,535.07) 1220,535.07 ccw(c1255.07,535.07) P3.1@1230.27,510.27 ; P3.1@1220,500 1220,595 ; D6.1@1420,488.9 1420,595 ; R34.1@1540,470.31 1540,595 ; 1586.72,595 cw(c1586.72,541.72) 1624.39,579.39 cw(c1538.43,493.43) 1660,493.43 ; pad.18@1633.91,575.04 cw(c1631.88,546.99) 1660,546.99 ; pad.18@1645.61,600.61 cw(c1610.86,565.86) 1660,565.86 ; pad.18@1649.19,585.13 ccw(c1672.22,577.22) 1655,560 ; P4.1@1649.73,470.27 ccw(c1624.93,495.07) 1660,495.07 ccw(c1695.07,495.07) P4.1@1670.27,470.27 ; P4.1@1660,460 1660,555 1620,595 1540,595 ; pad.19@349.69,595 490,595 ; 490,595 v1(1005,595) 1220,595 ; 1220,595 1420,595 ; 1420,595 1540,595
  Bottom Layer w10: v1@452.4,-707.4 ccw(c434.05,-689.05) 460,-689.05 ccw(c485.95,-689.05) v1@467.6,-707.4 ; v1@452.4,587.4 cw(c434.05,569.05) 460,569.05 cw(c485.95,569.05) v1@467.6,587.4 ; v1(460,-715) v1(460,595)
  Bottom Layer w30: P2.1@-360,1500 -350,1500 -198.43,1651.57 ; P2.1@-360,1514.53 ccw(c-360,1573.74) -318.13,1531.87 ; P1.2@-222.62,1145.77 ccw(c-281.02,1204.17) -198.43,1204.17 ccw(c-115.83,1204.17) P1.2@-174.23,1145.77 ; P1.2@-222.62,1294.23 cw(c-281.02,1235.83) -198.43,1235.83 cw(c-115.83,1235.83) P1.2@-174.23,1294.23 ; P1.2@-222.62,1342.62 ccw(c-281.02,1401.02) -198.43,1401.02 ccw(c-115.83,1401.02) P1.2@-174.23,1342.62 ; P1.2@-198.43,1121.57 P1.2@-198.43,1318.43 -198.43,1651.57 ; pad.0@-135,1730 cw(c-171.21,1730) -145.61,1704.39 cw(c-120,1678.79) pad.0@-120,1715 ; pad.0@-120,1730 -198.43,1651.57 ; pad.7@819.39,1539.39 cw(c793.79,1513.79) 830,1513.79 cw(c866.21,1513.79) pad.7@840.61,1539.39 ; v1(830,1195) v1(830,1280) v1(830,1360) pad.7@830,1550 ; pad.13@994.39,1244.39 cw(c968.79,1218.79) 1005,1218.79 cw(c1041.21,1218.79) pad.13@1015.61,1244.39 ; v1(1005,595) v1(1005,1020) v1(1005,1180) pad.13@1005,1255
AVCC+: C5.2 C10.2 C17.2 L2.2 pad.0@-1040,1001 pad.12 pad.17 R16.2 R29.1 U6.7 | length 3713.4
  Top Layer w20: U6.7@494.49,1325 v1(570,1325) 605,1325 650,1280 C5.2@709.69,1280 ; C5.2@703.81,1274.13 ccw(c689.63,1259.94) 689.63,1280 ccw(c689.63,1300.06) C5.2@703.81,1285.87 ; C17.2@1144.44,1026.86 ccw(c1130.26,1041.04) 1150.32,1041.04 ccw(c1170.37,1041.04) C17.2@1156.19,1026.86 ; C17.2@1150.32,1020 1150.32,1074.68 pad.12@1364.68,1074.68 ; pad.12@1350.54,1060.54 ccw(c1316.4,1026.4) 1316.4,1074.68 ccw(c1316.4,1122.97) pad.12@1350.54,1088.83
  Top Layer w30: R16.2@-1129.68,1000 -1128.68,1001 pad.0@-1040,1001 -431,1001 ; pad.0@-1050.61,990.39 ccw(c-1076.21,964.79) -1076.21,1001 ccw(c-1076.21,1037.21) pad.0@-1050.61,1011.61 ; pad.0@-1029.39,990.39 cw(c-1003.79,964.79) -1003.79,1001 cw(c-1003.79,1037.21) pad.0@-1029.39,1011.61 ; C10.2@-300.31,880 L2.2@-391.34,880 -391.34,961.34 -431,1001 ; 110.25,1025.25 cw(c170,965.5) pad.17@170,1050 ; pad.17@180.61,1054.39 cw(c230.36,1004.64) 230.36,1075 ; 800.48,1075 ccw(c800.48,1104.99) R29.1@821.69,1083.78 ; R29.1@858.31,1083.78 ccw(c879.52,1104.99) 879.52,1075 ; 1150,1075 v1(570,1075) 160,1075 86,1001 -431,1001
  Bottom Layer w20: v1(570,1075) v1(570,1325)
AVCC-: C4.2 C12.1 C16.2 L3.2 pad.1@-1060,779 pad.10@-925,1070 pad.11 pad.16 R17.2 R28.1 U6.4 | length 4083.3
  Top Layer w20: pad.16@291.37,1154.14 ccw(c257.23,1188.28) 305.51,1188.28 ccw(c353.8,1188.28) pad.16@319.65,1154.14 ; pad.16@305.51,1125.51 U6.4@305.51,1225 ; C16.2@1144.44,1173.14 cw(c1130.26,1158.96) 1150.32,1158.96 cw(c1170.37,1158.96) C16.2@1156.19,1173.14 ; 1150.32,1125.32 C16.2@1150.32,1180
  Top Layer w30: R17.2@-1395.32,890 -1395.32,883.33 -1290.98,779 pad.1@-1060,779 -1014.02,779 -919.68,873.33 C12.1@-919.68,880 L3.2@-828.66,880 ; pad.1@-1070.61,768.39 ccw(c-1096.21,742.79) -1096.21,779 ccw(c-1096.21,815.21) pad.1@-1070.61,789.61 ; pad.1@-1049.39,768.39 cw(c-1023.79,742.79) -1023.79,779 cw(c-1023.79,815.21) pad.1@-1049.39,789.61 ; pad.10@-939.09,1075.16 cw(c-980.3,1090.25) v1(-980.3,1046.36) 66.36,1046.36 145,1125 570,1125 1150,1125 ; pad.10@-935.61,1059.39 ccw(c-904.14,1090.86) -904.14,1046.36 ; pad.10@-914.39,1080.61 ccw(c-831.72,1163.28) -831.72,1046.36 ; 233.09,1125 ccw(c233.09,1212.43) pad.16@294.91,1150.61 ; pad.16@316.12,1150.61 ccw(c377.94,1212.43) 377.94,1125 ; 518.41,1125 ccw(c518.41,1172.06) R28.1@551.69,1138.78 ; R28.1@588.31,1138.78 ccw(c621.59,1172.06) 621.59,1125 ; 709.68,1125.32 C4.2@709.68,1200 ; 1150.32,1125.32 pad.11@1274.68,1125.32 ; pad.11@1264.08,1114.71 ccw(c1238.47,1089.1) 1238.47,1125.32 ccw(c1238.47,1161.53) pad.11@1264.08,1135.92
  Bottom Layer w30: v1(-981.97,811.05) v1(-980.3,1046.36)
COM: C10.1 C12.2 D2.A D3.K pad.2@-1260,940 R30.2 U1.5 | length 3292.2
  Top Layer w30: D2.A@-1395.32,990 -1395.32,996.67 -1336.98,1055 -1280,1055 -1260,1035 -1260,845 -1230,815 -1188.02,815 -1129.69,873.33 D3.K@-1129.69,880 C12.2@-980.31,880 -980.31,944.69 -970,955 -615,955 -615,755 U1.5@-520,660 -460,600 -385,600 -239.68,745.32 C10.1@-239.68,880 ; pad.2@-1270.61,929.39 cw(c-1296.21,903.79) -1260,903.79 cw(c-1223.79,903.79) pad.2@-1249.39,929.39 ; pad.2@-1270.61,950.61 ccw(c-1296.21,976.21) -1260,976.21 ccw(c-1223.79,976.21) pad.2@-1249.39,950.61 ; R30.2@-621.34,1479.57 cw(c-621.34,1430.24) -586.46,1465.12 ; R30.2@-621.34,1500 -540,1418.66 v1(-540,1415) ; U1.5@-538.46,660 ccw(c-583.04,660) -551.52,691.52 ccw(c-520,723.04) U1.5@-520,678.46 ; U1.5@-520,641.54 cw(c-520,596.96) -488.48,628.48 cw(c-456.96,660) U1.5@-501.54,660
  Bottom Layer w30: v1@-540.53,1414.47 cw(c-590.09,1364.91) -520,1364.91 ; v1@-540.22,1414.29 cw(c-548.9,1386.72) -520,1386.72 ; v1(-540,1415) -520,1395 U1.5@-520,660 ; U1.5@-533.06,673.06 ccw(c-564.58,704.58) -520,704.58 ccw(c-475.42,704.58) U1.5@-506.94,673.06
CON1_N: J1.4 R8.1 R11.2 U5.7 | length 1539
  Top Layer w10: U5.7@-1227.64,-695 R8.1@-1139.69,-695 ; U5.7@-1199.78,-701.21 cw(c-1184.79,-716.2) -1184.79,-695 cw(c-1184.79,-673.8) U5.7@-1199.78,-688.79 ; -1179.42,-695 cw(c-1179.42,-743.13) R8.1@-1145.39,-709.1 ; -1156.8,-695 ccw(c-1156.8,-678.87) R8.1@-1145.39,-690.28 ; -1155.28,-695 cw(c-1155.28,-718.98) R8.1@-1138.32,-702.02 ; R8.1@-1144.41,-690.28 ccw(c-1167.13,-667.56) -1135,-667.56 ccw(c-1102.87,-667.56) R8.1@-1125.59,-690.28 ; R11.2@-1144.41,-629.73 cw(c-1167.13,-652.44) -1135,-652.44 cw(c-1102.87,-652.44) R11.2@-1125.59,-629.73 ; R11.2@-1135,-620.32 R8.1@-1135,-699.69 -1110,-699.69 ; R8.1@-1122.73,-706.74 cw(c-1110,-714.7) -1110,-699.69 ; R8.1@-1122.73,-692.63 ccw(c-1110,-684.67) -1110,-699.69 ; J1.4@-245.87,-475.48 ccw(c-284.38,-513.99) -284.38,-459.53 ccw(c-284.38,-405.07) J1.4@-245.87,-443.58 ; J1.4@-238.8,-468.41 ccw(c-260.24,-489.85) -260.24,-459.53 ccw(c-260.24,-429.21) J1.4@-238.8,-450.65 ; J1.4@-229.92,-459.53 -869.84,-459.53 -1110,-699.69
CON1_P: J1.3 R6.1 R8.2 U5.6 | length 1539.5
  Top Layer w10: U5.6@-1227.64,-745 R8.2@-1150.32,-745 ; U5.6@-1205.09,-745 cw(c-1205.09,-829.42) R8.2@-1145.39,-769.73 ; U5.6@-1199.78,-751.21 cw(c-1184.79,-766.2) -1184.79,-745 cw(c-1184.79,-723.8) U5.6@-1199.78,-738.79 ; -1180.94,-745 cw(c-1180.94,-805.28) R8.2@-1138.32,-762.65 ; -1156.8,-745 cw(c-1156.8,-781.13) R8.2@-1131.25,-755.58 ; R6.1@-1144.41,-830.28 ccw(c-1167.13,-807.56) -1135,-807.56 ccw(c-1102.87,-807.56) R6.1@-1125.59,-830.28 ; R8.2@-1144.41,-769.73 cw(c-1167.13,-792.44) -1135,-792.44 cw(c-1102.87,-792.44) R8.2@-1125.59,-769.73 ; R6.1@-1135,-839.69 R8.2@-1135,-760.32 -1110,-760.32 ; R8.2@-1122.73,-767.37 cw(c-1110,-775.33) -1110,-760.32 ; R8.2@-1122.73,-753.26 ccw(c-1110,-745.3) -1110,-760.32 ; J1.3@-315.95,-515.64 ccw(c-354.46,-554.15) -354.46,-499.68 ccw(c-354.46,-445.22) J1.3@-315.95,-483.73 ; J1.3@-308.88,-508.56 ccw(c-330.32,-530) -330.32,-499.68 ccw(c-330.32,-469.36) J1.3@-308.88,-490.8 ; J1.3@-300,-499.68 -849.37,-499.68 -1110,-760.32
CON2_N: J1.6 R7.1 R9.2 U4.7 | length 1474.4
  Top Layer w10: U4.7@-1227.64,-265 -1135.31,-265 R7.1@-1135,-264.69 ; U4.7@-1199.78,-271.21 cw(c-1184.79,-286.2) -1184.79,-265 cw(c-1184.79,-243.8) U4.7@-1199.78,-258.79 ; -1168.87,-265 ccw(c-1168.87,-231.8) R7.1@-1145.39,-255.28 ; -1167.35,-265 cw(c-1167.35,-296.05) R7.1@-1145.39,-274.1 ; R7.1@-1144.41,-255.28 ccw(c-1167.13,-232.56) -1135,-232.56 ccw(c-1102.87,-232.56) R7.1@-1125.59,-255.28 ; R9.2@-1144.41,-194.73 cw(c-1167.13,-217.44) -1135,-217.44 cw(c-1102.87,-217.44) R9.2@-1125.59,-194.73 ; R9.2@-1135,-185.32 R7.1@-1135,-264.69 ; R7.1@-1122.73,-271.74 cw(c-1110,-279.7) -1110,-264.69 ; R7.1@-1122.73,-257.63 ccw(c-1110,-249.67) -1110,-264.69 ; J1.6@-245.87,-395.16 ccw(c-284.38,-433.67) -284.38,-379.21 ccw(c-284.38,-324.75) J1.6@-245.87,-363.26 ; J1.6@-238.8,-388.09 ccw(c-260.24,-409.53) -260.24,-379.21 ccw(c-260.24,-348.89) J1.6@-238.8,-370.33 ; J1.6@-229.92,-379.21 -314.37,-379.21 -338.56,-355.03 -338.56,-352.53 -385.77,-305.32 -1069.37,-305.32 -1110,-264.69 ; R7.1@-1135,-264.69 -1110,-264.69
CON2_P: J1.5 R7.2 R37.1 U4.6 | length 1323.2
  Top Layer w10: U4.6@-1227.64,-315 -1145.32,-315 R7.2@-1135,-325.32 ; U4.6@-1199.78,-321.21 cw(c-1184.79,-336.2) -1184.79,-315 cw(c-1184.79,-293.8) U4.6@-1199.78,-308.79 ; U4.6@-1193.02,-315 cw(c-1193.02,-382.35) R7.2@-1145.39,-334.73 ; -1168.87,-315 cw(c-1168.87,-358.21) R7.2@-1138.32,-327.65 ; R37.1@-1144.41,-395.28 ccw(c-1167.13,-372.56) -1135,-372.56 ccw(c-1102.87,-372.56) R37.1@-1125.59,-395.28 ; R7.2@-1144.41,-334.73 cw(c-1167.13,-357.44) -1135,-357.44 cw(c-1102.87,-357.44) R7.2@-1125.59,-334.73 ; R37.1@-1135,-404.69 R7.2@-1135,-325.32 ; R7.2@-1124.61,-334.73 cw(c-1101.89,-357.44) -1101.89,-325.32 cw(c-1101.89,-293.19) R7.2@-1124.61,-315.91 ; J1.5@-300,-419.37 -302.5,-419.37 -358.56,-363.31 -358.56,-360.81 -394.05,-325.32 R7.2@-1135,-325.32